# Altium PCB Front End.PcbDoc
Units mm, origin at the board's own origin, x right, y up, seen from the top; angles counter-clockwise.
Board outline 65 x 65 mm, 2 copper layers (Top Layer, Bottom Layer); 22 components, 13 nets, 59 pads, 0 vias.
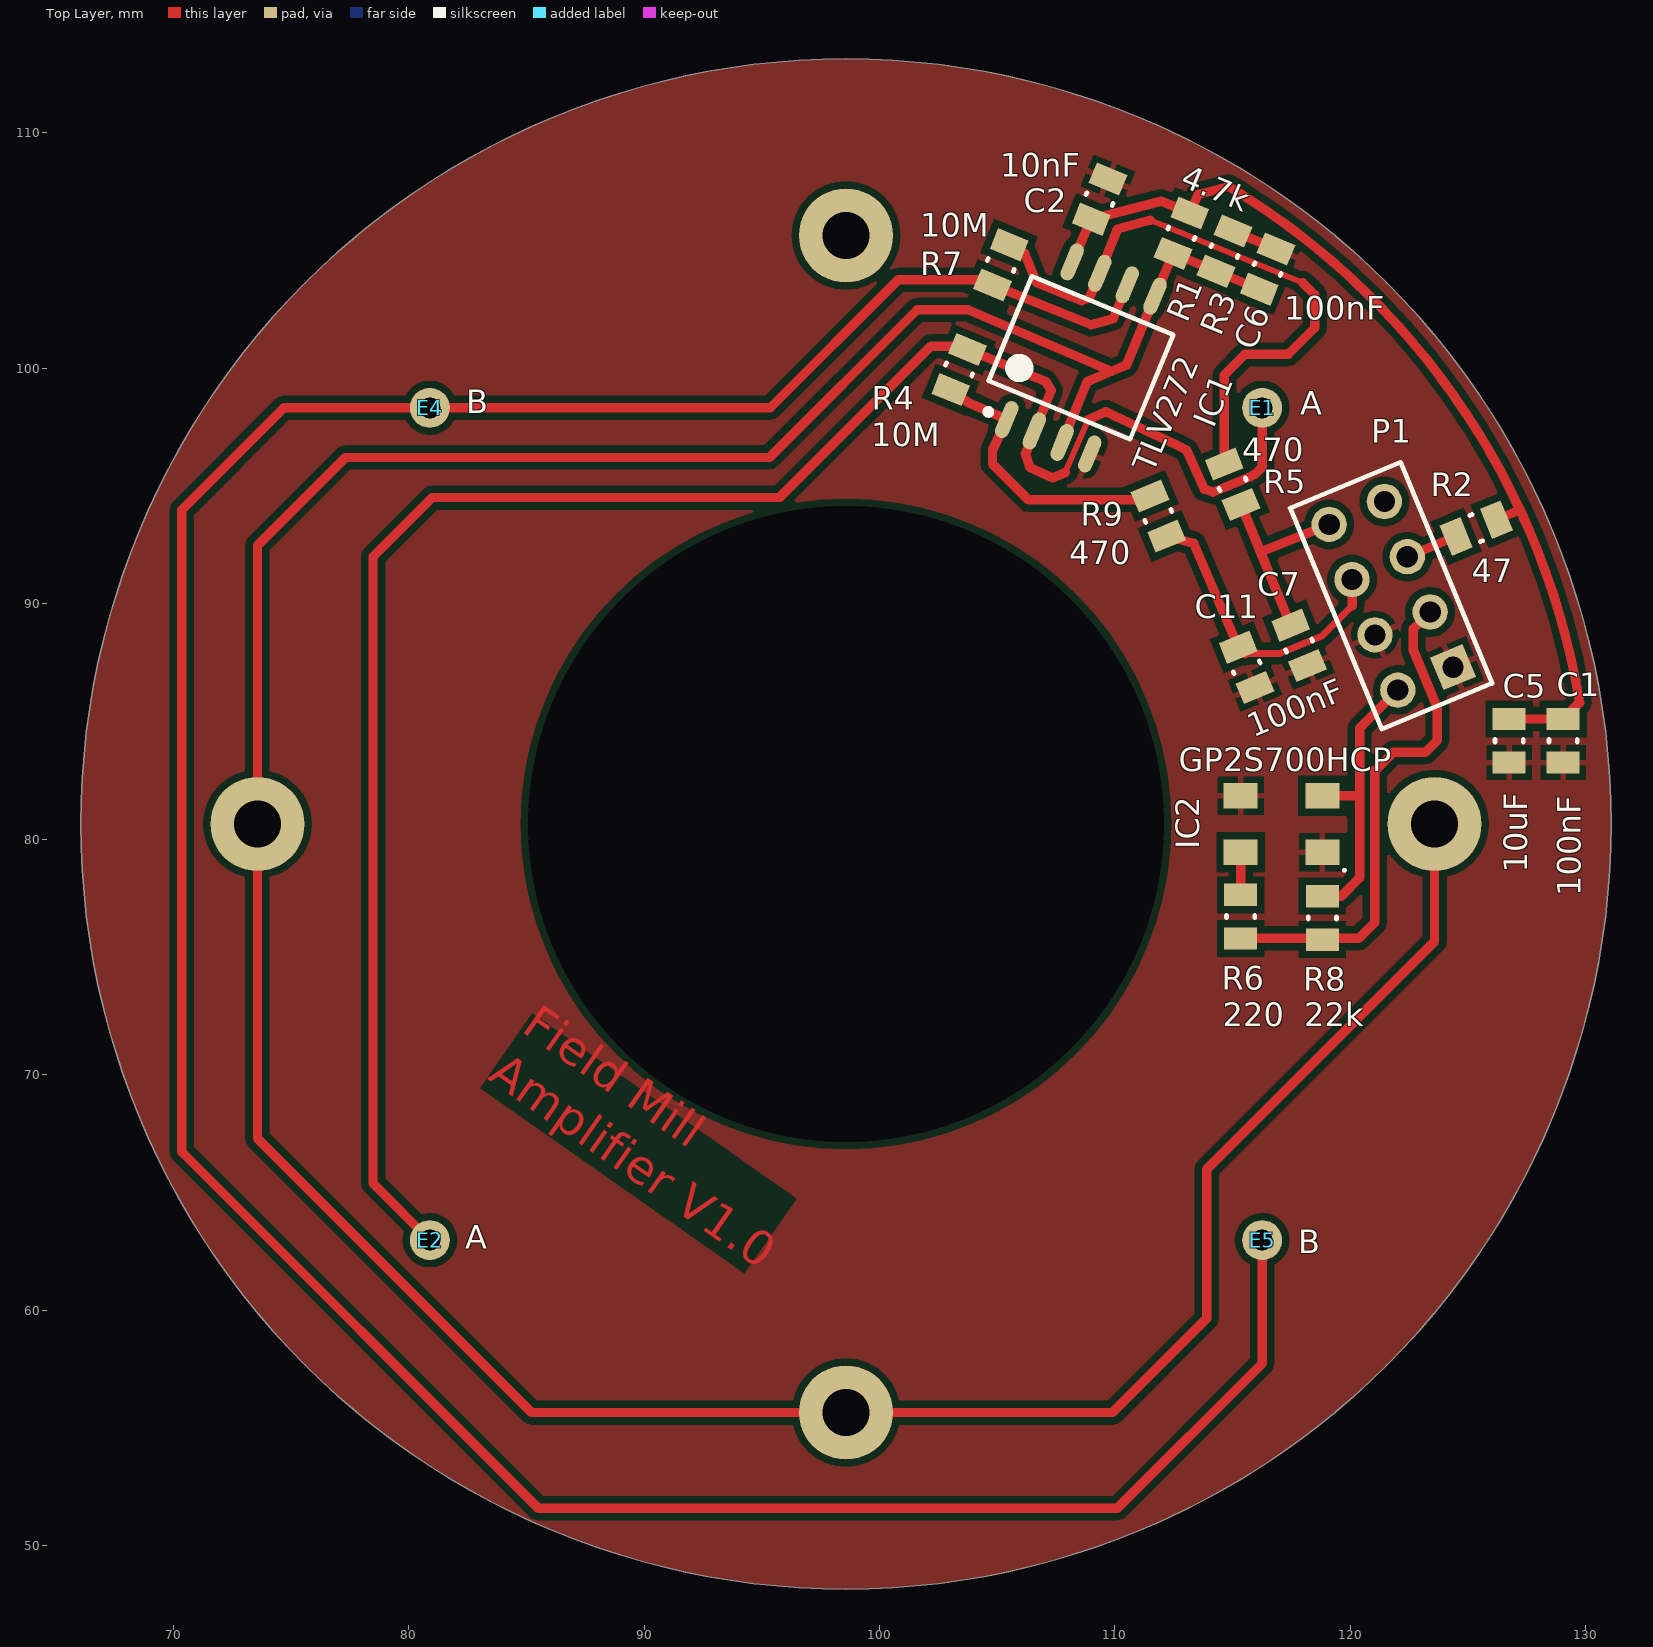
[diagram p0: Top Layer view]
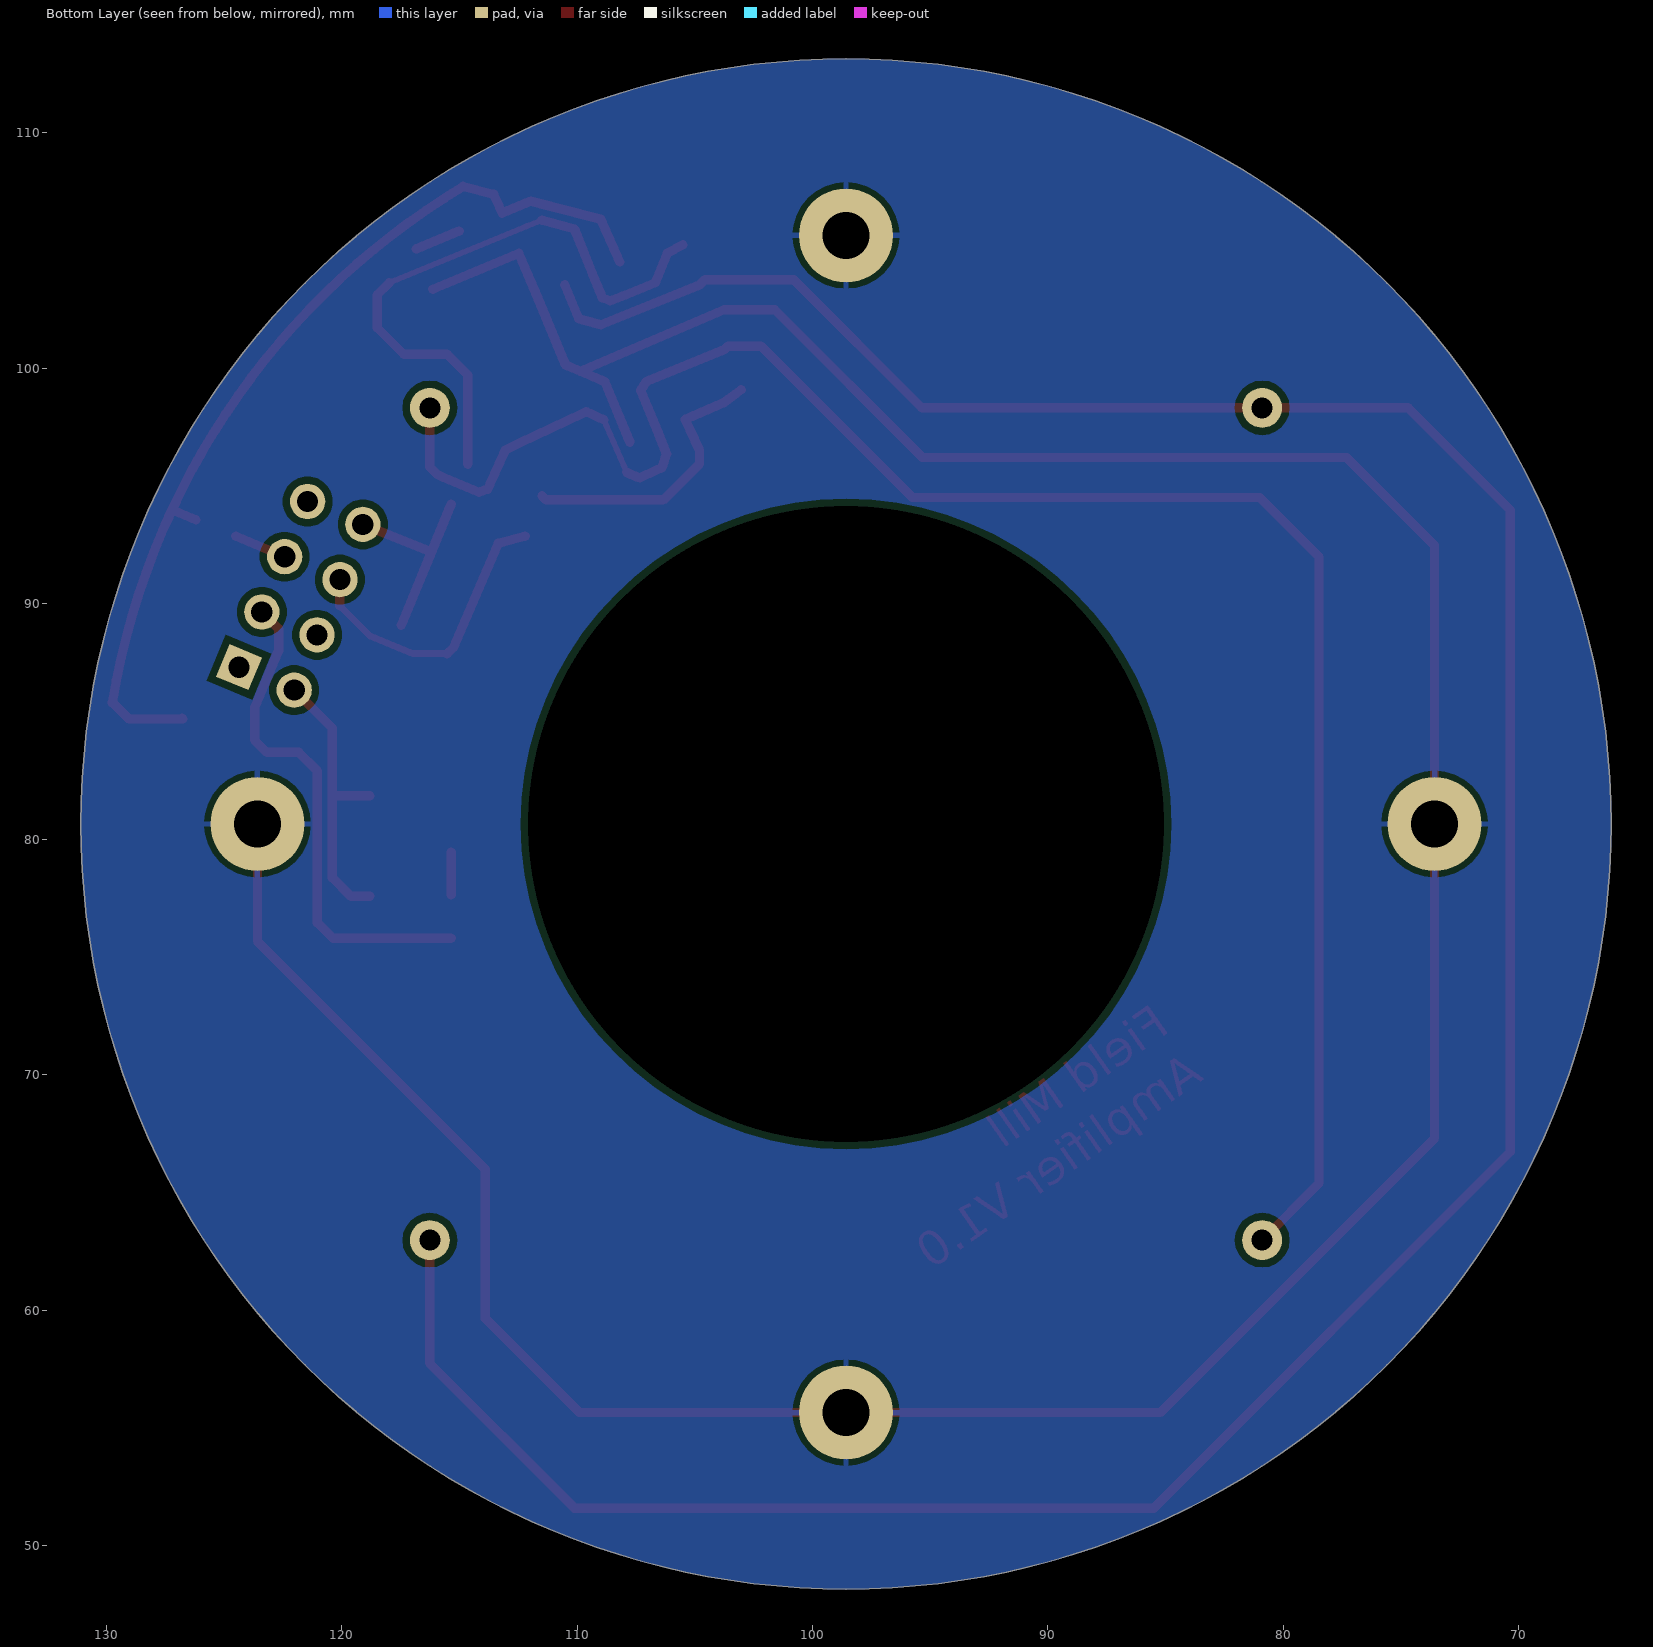
[diagram p1: Bottom Layer view, seen from below]

## Layer stack, top to bottom
Top Solder: solder mask 0.0102, Solder Resist, Dk 3.5
Top Layer: signal copper 0.0356
Dielectric 1: dielectric 0.32, FR-4, Dk 4.8
Bottom Layer: signal copper 0.0356
Bottom Solder: solder mask 0.0102, Solder Resist, Dk 3.5

## Board outline
66.077,80.645 ccw(c98.577,80.645) 98.577,48.145 ccw(c98.577,80.645) 131.077,80.645 ccw(c98.577,80.645) 98.577,113.145 ccw(c98.577,80.645)

## Design rules (kind name [scope] priority, off if disabled: settings)
Clearance [All] p1: gap=0.3 ignorepadtopadclearanceinfootprint=FALSE except(0: Arc-Text Arc-Hole Track-Text Track-Hole SMDPad-Text SMDPad-Hole THPad-Text THPad-Hole Via-Text Via-Hole Fill-Text Fill-Hole Poly-Text Poly-Hole Region-Text Region-Hole Text-Text Text-Hole; 0.15: Arc-Arc Arc-Track Arc-SMDPad Arc-THPad Arc-Via Track-Track Track-SMDPad Track-THPad Track-Via SMDPad-SMDPad SMDPad-THPad SMDPad-Via THPad-THPad THPad-Via Via-Via)
PolygonConnect [All] p1: connectstyle=Relief reliefconductorwidth=0.254 reliefentries=4 polygonreliefangle="90 Angle" airgapwidth=0.254
RoutingVias [All] p1: holewidth=0.711 width=1.27 viastyle="Through Hole" minholewidth=0.711 minwidth=1.27 maxholewidth=0.711 maxwidth=1.27
SolderMaskExpansion [All] p1: expansion=0.102
Width [All] p1: maxlimit=10 minlimit=0.15 preferedwidth=0.254 minimp=50.000000 maximp=50.000000 favimp=50.000000
30 further rules are at their usual default settings.

## Components (designator, comment, footprint, x,y, rotation, side; value= is the part's Value field where it differs from the comment)
C1 "100nF" 0805 129.04,84.181 r90 top
C2 "10nF" 0805 109.347,107.188 r247.5 top
C5 "10uF" 0805 126.746,84.181 r90 top
C6 "100nF" 0805 116.484,104.216 r247.5 top
C7 "100nF" 0805 117.823,88.231 r112.5 top
C11 "100nF" 0805 115.595,87.3 r112.5 top
E1 "A" TESTPOINT_THT 116.255,98.323 r0 top
E2 "A" TESTPOINT_THT 80.899,62.967 r90 top
E4 "B" TESTPOINT_THT 80.899,98.323 r90 top
E5 "B" TESTPOINT_THT 116.255,62.967 r90 top
IC1 "TLV272" "SO 8" 108.555,100.446 r67.5 top
IC2 "GP2S700HCP" GP2S700HCP 117.077,80.645 r180 top
P1 "Header 4X2" HDR2X4 124.364,87.305 r112.5 top
R1 "4.7k" 0805 112.827,105.74 r247.5 top
R2 "47" 0805 125.349,93.218 r22.5 top
R3 "4.7k" 0805 114.656,104.978 r67.5 top
R4 "10M" 0805 103.378,99.949 r247.5 top
R5 "470" 0805 114.998,95.077 r112.5 top
R6 "220" 0805 115.342,76.708 r270 top
R7 "10M" 0805 105.156,104.394 r67.5 top
R8 "22k" 0805 118.812,76.658 r90 top
R9 "470" 0805 111.845,93.726 r112.5 top

## Footprints (in the part's own frame and the unit in brackets; to place one, negate y for a bottom-side part, rotate by r counter-clockwise, add the part's x,y. Pads: shape width x height; smd on the part's side, far side on the other; paste and mask are expansions set on the pad)
0805 [mm] "Chip Resistor, 2-Leads, Body 2.00x1.25mm, IPC Medium Density"
  rect 0.95x1.4 smd: 1(-0.925,0) 2(0.925,0)
  silkscreen extent -0.05,-0.6 0.05,0.6, body extent -1.05,-0.7 1.05,0.7, height 0.55
GP2S700HCP [mm] "SON, 4-Leads, Body 3,00x4,00mm, Pitch 2,40mm, IPC Low Density"
  rect 1.45x1.1 smd: 1(-1.735,1.2) 2(-1.735,-1.2) 3(1.735,-1.2) 4(1.735,1.2)
  silkscreen extent -2.72,1.91 -2.62,2.01, body extent -2,-1.5 2,1.5, height 2
HDR2X4 [mm] "Connector; Header; 4x2 Position"
  rect 1.5x1.5 hole 0.9: 1(0,0)
  round 1.5 hole 0.9: 2(0,2.54) 3(2.54,0) 4(2.54,2.54) 5(5.08,0) 6(5.08,2.54) 7(7.62,0) 8(7.62,2.54)
  silkscreen extent -1.27,-1.27 8.89,3.81
"SO 8" [mm] "SOIC, 8-Leads, Body 6,20x5,30mm, Pitch 1,27mm, IPC Medium Density"
  oval 1.65x0.6 smd: 1(-3.625,1.905) 2(-3.625,0.635) 3(-3.625,-0.635) 4(-3.625,-1.905) 5(3.625,-1.905) 6(3.625,-0.635) 7(3.625,0.635) 8(3.625,1.905)
  silkscreen extent -3.75,-3.25 2.4,3.25, body extent -3.9,-3.25 3.9,3.25, height 2
TESTPOINT_THT [mm]
  round 1.7 hole 0.9: 1(0,0)

## Part data
C1 C2 C5 C6 C7 C11: library part Cap, Supplier Part Number 1=1276-2044-1-ND, Supplier Part Number 10=1276-CL10B104KB8NNNLCT-ND, Supplier Part Number 11=399-1085-1-ND, Supplier Part Number 12=1276-1021-1-ND, Supplier Part Number 13=587-2985-1-ND, Supplier Part Number 14=490-14603-1-ND, Supplier Part Number 15=311-3700-1-ND, Supplier Part Number 16=311-1042-1-ND, Supplier Part Number 17=311-1415-1-ND, Supplier Part Number 18=1276-1907-1-ND, Supplier Part Number 19=587-4321-1-ND, Supplier 1=Digi-Key, Supplier 2=Digi-Key, Supplier 3=Digi-Key, Supplier 4=Digi-Key, Supplier 5=Digi-Key, Supplier 6=Digi-Key, Supplier 7=Digi-Key, Supplier 8=Digi-Key, Supplier 9=Digi-Key, Supplier 10=Digi-Key, Supplier 11=Digi-Key, Supplier 12=Digi-Key, Supplier 13=Digi-Key, Supplier 14=Digi-Key, Supplier 15=Digi-Key, Supplier 16=Digi-Key, Supplier 17=Digi-Key, Supplier 18=Digi-Key, Supplier 19=Digi-Key, Supplier 20=Digi-Key, Supplier 21=Digi-Key, Supplier 22=Digi-Key, Supplier Part Number 2=1276-1018-1-ND, Supplier Part Number 3=1276-1182-1-ND, Supplier Part Number 4=1276-1009-1-ND, Supplier Part Number 5=1276-1098-1-ND, Supplier Part Number 6=1276-1119-1-ND, Supplier Part Number 7=490-12737-1-ND, Supplier Part Number 8=1276-1183-1-ND, Supplier Part Number 9=587-1249-1-ND, Supplier Part Number 20=1276-6767-1-ND, Supplier Part Number 21=1276-7060-1-ND, Supplier Part Number 22=311-1084-1-ND
E1 E2 E4 E5: library part "Test Point"
IC1: library part "OpAmp Dual", Supplier Part Number 1=497-TSZ182IDTCT-ND, Supplier 1=Digi-Key
IC2: "Optical reflection interrupter", Supplier Part Number 1=1855-1020-1-ND, Supplier 1=Digi-Key
P1: "Header, 4-Pin, Dual row", LatestRevisionDate=17-Jul-2002, LatestRevisionNote="Re-released for DXP Platform.", Publisher="Altium Limited"
R1 R2 R3 R4 R5 R6 R7 R8 R9: library part Resistor, Supplier Part Number 1=RHM10DCT-ND, Supplier Part Number 10=311-200JRCT-ND, Supplier Part Number 11=311-300JRCT-ND, Supplier Part Number 12=YAG3356CT-ND, Supplier Part Number 13=311-220GRCT-ND, Supplier Part Number 14=311-220KGRCT-ND, Supplier Part Number 15=311-1.0KGRCT-ND, Supplier Part Number 16=311-200KHRCT-ND, Supplier Part Number 17=A102451-ND, Supplier Part Number 18=311-2.00KHRCT-ND, Supplier Part Number 19=311-10KGRCT-ND, Supplier 1=Digi-Key, Supplier 2=Digi-Key, Supplier 3=Digi-Key, Supplier 4=Digi-Key, Supplier 5=Digi-Key, Supplier 6=Digi-Key, Supplier 7=Digi-Key, Supplier 8=Digi-Key, Supplier 9=Digi-Key, Supplier 10=Digi-Key, Supplier 11=Digi-Key, Supplier 12=Digi-Key, Supplier 13=Digi-Key, Supplier 14=Digi-Key, Supplier 15=Digi-Key, Supplier 16=Digi-Key, Supplier 17=Digi-Key, Supplier 18=Digi-Key, Supplier 19=Digi-Key, Supplier 20=Digi-Key, Supplier 21=Digi-Key, Supplier 22=Digi-Key, Supplier 23=Digi-Key, Supplier 24=Digi-Key, Supplier 25=Digi-Key, Supplier 26=Digi-Key, Supplier 27=Digi-Key, Supplier 28=Digi-Key, Supplier 29=Digi-Key, Supplier 30=Digi-Key, Supplier 31=Digi-Key, Supplier 32=Digi-Key, Supplier 33=Digi-Key, Supplier 34=Digi-Key, Supplier 35=Digi-Key, Supplier 36=Digi-Key, Supplier 37=Digi-Key, Supplier 38=Digi-Key, Supplier 39=Digi-Key, Supplier 40=Digi-Key, Supplier 41=Digi-Key, Supplier 42=Arrow, Supplier Part Number 2=696-1834-1-ND, Supplier Part Number 3=RMCF0603JT3K90CT-ND, Supplier Part Number 4=RHM1.0KDCT-ND, Supplier Part Number 5=RHM100DCT-ND, Supplier Part Number 6=RMCF0603FT54K9CT-ND, Supplier Part Number 7=RMCF0603FT40K2CT-ND, Supplier Part Number 8=P200LCT-ND, Supplier Part Number 9=311-1.0KJRCT-ND, Supplier Part Number 20=311-1.00LRCT-ND, Supplier Part Number 21=311-220JRCT-ND, Supplier Part Number 22=311-2.2KJRCT-ND, Supplier Part Number 23=311-4.7KJRCT-ND, Supplier Part Number 24=311-10.0KLRCT-ND, Supplier Part Number 25=311-12KJRCT-ND, Supplier Part Number 26=YAG3226CT-ND, Supplier Part Number 27=311-75KJRCT-ND, Supplier Part Number 28=311-200KJRCT-ND, Supplier Part Number 29=311-499KLRCT-ND, Supplier Part Number 30=YAG6087CT-ND, Supplier Part Number 31=696-1677-1-ND, Supplier Part Number 32=541-3127-6-ND, Supplier Part Number 33=311-47.0HRCT-ND, Supplier Part Number 34=311-470HRCT-ND, Supplier Part Number 35=311-470KGRCT-ND, Supplier Part Number 36=311-100KGRCT-ND, Supplier Part Number 37=311-5.23KHRCT-ND, Supplier Part Number 38=311-52.3KHRCT-ND, Supplier Part Number 39=311-22KGRCT-ND, Supplier Part Number 40=311-15.8KHRCT-ND, Supplier Part Number 41=311-7.15KHRCT-ND, Supplier Part Number 42=RC0603FR-072K2L

## Free pads (board coordinates)
  round 5 hole 27: 11(98.577,80.645)
  round 4 hole 2: ""(73.577,80.645) ""(98.577,55.645) ""(98.577,105.645) ""(123.577,80.645)

## Nets (pads, with @x,y where several pads share a name; then routed paths per layer and width w, separated by ;. In a path a pad name is that pad's centre, name@x,y a point inside that pad or via, vN(x,y) a via of type N, cw(c..) or ccw(c..) an arc to the next point about the centre after c; other vN are vias at no path point)
2.5V: C6.2 IC1.3 IC1.5 pad. R1.2 R3.1 | length 151.7
  Top Layer w0.4: IC1.3 108.826,99.441 109.855,99.873 ; R3.1 R1.2 IC1.5 110.49,100.139 109.855,99.873 ; R3.1 C6.2 ; pad.@123.577,80.645 123.577,75.657 113.894,65.973 113.894,59.639 109.899,55.645 98.577,55.645 85.223,55.645 73.577,67.291 73.577,80.645 73.577,92.475 77.318,96.215 95.326,96.215 101.6,102.489 103.759,102.489 109.855,99.873
5V: C1.2 C2.2 C5.2 IC1.8 R1.1 R2.2 | length 40.3
  Top Layer w0.4: IC1.8 C2.2 111.954,107.101 ; 111.956,107.105 R1.1 113.538,107.391 114.833,107.729 cw(c98.577,80.645) 127.206,93.993 ; R2.2 127.206,93.993 ; C5.2@126.77,85.13 C5.2 C1.2 129.738,85.803 129.738,85.821 ccw(c98.577,80.645) 127.206,93.993
"5V unfiltered": P1.3 R6.2 R8.1 | length 21.6
  Top Layer w0.4: R6.2 120.36,75.783 121.031,76.454 121.031,82.895 121.829,83.693 123.19,83.693 123.698,84.201 123.698,85.598 122.682,88.011 122.682,88.942 P1.3
GND: C1.1 C2.1 C5.1 C6.1 C7.1 C11.1 IC1.4 IC2.1 IC2.3 P1.1 P1.4 R3.2 | length 2
  Top Layer w0.4: R3.2 C6.1
NetC7_2: C7.2 P1.8 R5.1 | length 8.9
  Top Layer w0.4: R5.1 116.184,92.202 ; C7.2 116.184,92.202 ; P1.8@119.101,93.146 P1.8 116.184,92.202
NetC11_2: C11.2 P1.6 R9.1 | length 12.7
  Top Layer w0.3: C11.2@115.512,87.884 116.967,87.884 118.812,88.646 120.073,89.907
  Top Layer w0.4: R9.1 113.354,92.565 C11.2 C11.2@115.512,87.884 ; 120.073,89.907 P1.6
NetE1_1: E1.1 E2.1 IC1.2 R4.1 | length 82.4
  Top Layer w0.25: 107.899,95.58 108.864,97.812
  Top Layer w0.4: E2.1 78.486,65.381 78.486,91.999 81.001,94.513 95.758,94.513 102.192,100.947 103.589,100.947 R4.1 107.061,99.441 107.294,99.06 IC1.2 106.197,96.368 106.401,95.779 107.34,95.345 107.899,95.58 ; 108.864,97.812 109.606,98.166 112.603,96.749 113.058,96.521 113.792,94.869 114.161,94.742 115.697,95.377 115.949,95.504 116.255,95.809 E1.1
NetE4_1: E4.1 E5.1 IC1.6 R7.1 | length 132.8
  Top Layer w0.4: IC1.6 109.931,102.108 108.993,101.854 R7.1 104.582,103.759 100.792,103.759 95.356,98.323 E4.1 74.701,98.323 70.358,93.98 70.358,66.726 85.496,51.587 110.109,51.587 116.255,57.733 E5.1
NetIC1_OUT1: IC1.1 R4.2 R9.2 | length 12.1
  Top Layer w0.4: R4.2 103.759,98.552 IC1.1 104.802,96.52 104.802,95.941 106.331,94.412 111.322,94.412 R9.2
NetIC1_OUT2: IC1.7 R5.2 R7.2 | length 26.7
  Top Layer w0.254: 111.506,106.299 112.141,106.045 117.983,103.632
  Top Layer w0.4: R7.2 106.172,104.886 106.68,103.632 108.077,103.066 108.585,102.87 108.925,102.997 IC1.7 110.109,105.918 111.506,106.299 ; R5.2 114.644,99.716 115.523,100.596 117.362,100.596 118.491,101.725 118.491,103.124 117.983,103.632
NetIC2_2: IC2.2 P1.2 R8.2 | length 12.2
  Top Layer w0.4: R8.2 119.62,77.583 120.396,78.359 120.396,81.788 ; IC2.2 120.339,81.845 120.396,81.788 ; P1.2 120.396,84.712 120.396,81.788
NetIC2_4: IC2.4 R6.1 | length 1.8
  Top Layer w0.4: R6.1 IC2.4
NetP1_5: P1.5 R2.1 | length 2.2
  Top Layer w0.4: P1.5 R2.1
pads on no net: P1.7

## Polygon pours and split planes (outlines as drawn)
2.5V on Bottom Layer "Top Layer-GND" (solid, pour order 4): 131.077,80.645 cw(c98.577,80.645) 98.577,48.145 cw(c98.577,80.645) 66.077,80.645 cw(c98.577,80.645) 98.577,113.145 cw(c98.577,80.645)
GND on Top Layer "Top Layer-GND" (solid, pour order 2): 66.077,80.645 ccw(c98.577,80.645) 98.577,48.145 ccw(c98.577,80.645) 131.077,80.645 ccw(c98.577,80.645) 98.577,113.145 ccw(c98.577,80.645)

## Other copper
Top Layer:
  text "Field Mill / Amplifier V1.0" at 83.033,69.418 h2.5 r325

## Silkscreen, mask and mechanical layers (free items; w line width, h text height)
Mechanical 8:
  circle w0.254: c98.577,80.645 r32.5